# EAGLE board Pure Quantiser Panel (EAGLE 8.4.0)
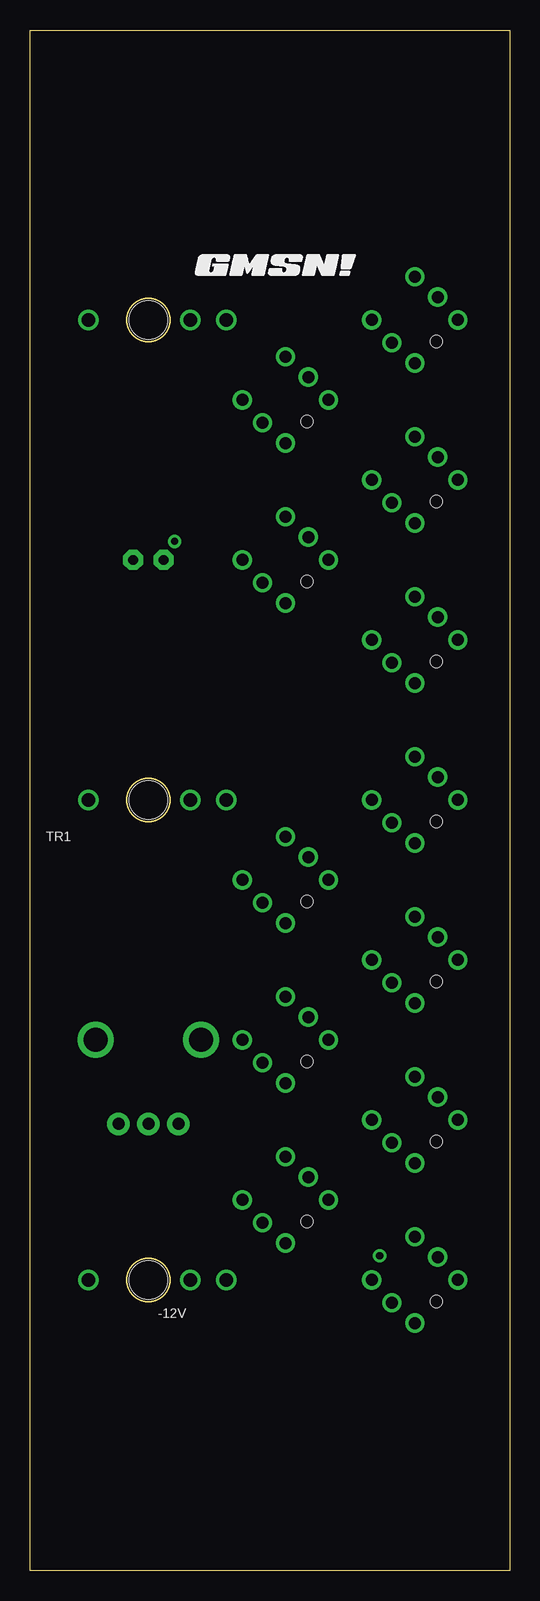
[diagram p0: board, top side]
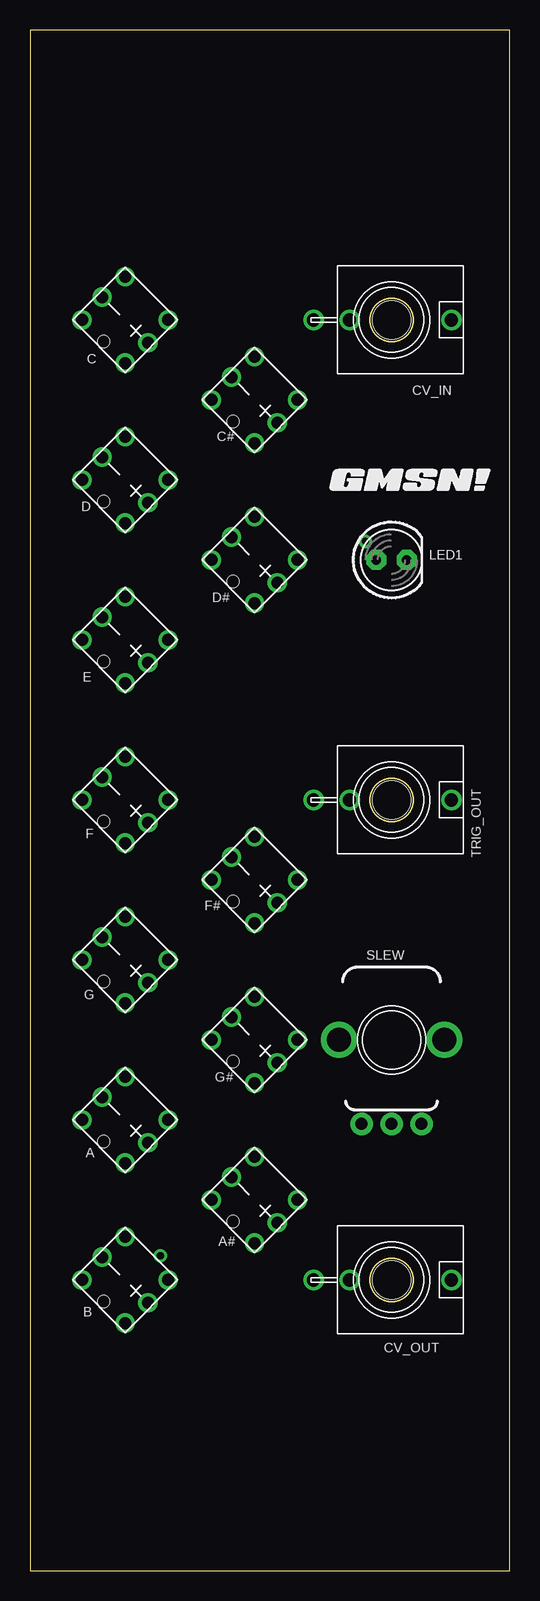
[diagram p1: board, bottom side, seen from below]

Size 40.03 x 128.4 mm. Coordinates in mm from the lower left corner, seen from the top.
Outline: 40.03,0 0,0 0,128.4 40.03,128.4 40.03,0
Copper layers (1*16): Top 0.035mm / dielectric 1.5mm / Bottom 0.035mm
Design rules "SparkFun": minimum track width 8mil, minimum drill 20mil, track to track 8mil, track to pad 8mil, pad to pad 8mil, via to via 8mil, smd to smd 8mil, copper to edge 10mil, drill to drill 8mil, minimum pad ring 12mil, minimum via ring 10mil, stop-mask expansion 4mil, vias tented up to drill 25mil, thermal gap 10mil
Holes 3.2 mm at 9.88,24.24 9.88,64.24 9.88,104.24

## Footprints (pad centres in the part's own frame; a part is rotated, then mirrored left to right if it is on the bottom)
PB6149L = drill 1: 1 2.54,-2.54; 2 2.54,2.54; 3 -2.54,-2.54; 4 -2.54,2.54; A 0,-2.7; K 0,2.7 | hole 1: -2.54,0
S_JACK = drill 1.1: GND 0,-6.5; NORM 0,-3.5; TIP 0,5
POT = drill 1 pad 1.88: P$1 -2.5,-7; P$2 0,-7; P$3 2.5,-7 | drill 2 pad 2.68: P$4 -4.4,0; P$5 4.4,0
LED5MM = drill 0.813 pad 1.676 octagon: A -1.27,0; K 1.27,0

## Placement (x,y rotation side)
1  PB6149L-5  [PB6149L]  32.1,104.24 45 bottom
2  PB6149L-5  [PB6149L]  21.3,97.57 45 bottom
3  PB6149L-5  [PB6149L]  32.1,90.91 45 bottom
4  PB6149L-5  [PB6149L]  21.3,84.24 45 bottom
5  PB6149L-5  [PB6149L]  32.1,77.57 45 bottom
6  PB6149L-5  [PB6149L]  32.1,64.24 45 bottom
7  PB6149L-5  [PB6149L]  21.3,57.57 45 bottom
8  PB6149L-5  [PB6149L]  32.1,50.91 45 bottom
9  PB6149L-5  [PB6149L]  21.3,44.24 45 bottom
10  PB6149L-5  [PB6149L]  32.1,37.57 45 bottom
11  PB6149L-5  [PB6149L]  21.3,30.91 45 bottom
12  PB6149L-5  [PB6149L]  32.1,24.24 45 bottom
CV_IN  S_JACK  [S_JACK]  9.88,104.24 270 bottom
CV_OUT  S_JACK  [S_JACK]  9.88,24.24 270 bottom
GLIDE  100K  [POT]  9.88,44.24 0 bottom
LED1  [LED5MM]  9.88,84.24 0 bottom
TRIG_OUT  S_JACK  [S_JACK]  9.88,64.24 270 bottom
U$1  [GMSN!_LOGO]  8.05,90.83 0 bottom
U$2  [GMSN!_LOGO]  20.75,108.73 0 top

## Library data of the parts
1-12 CV_IN CV_OUT GLIDE LED1 TRIG_OUT = GMSN
U$1 U$2 = gmsnLogo

## Nets
N$2: 9.A

## Tracks (layer width: path | path; a pad name or v marks a point on that pad's centre or on a via)
N$11  (via drill 0.6)
  other vias: 29.16,26.26
N$19  (via drill 0.6)
  other vias: 12.06,85.79

## Text on the board
tPlace: TR1 | -12V
bPlace: C | C# | D | D# | E | F | F# | SLEW | G | G# | A | A# | B